# Allegro board XR829_MD01_V1.0.brd
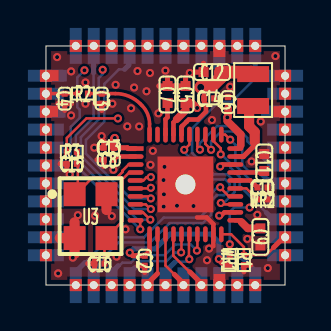
[diagram p0: board, top side]
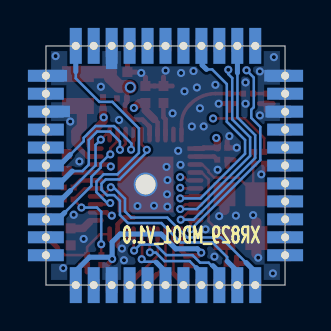
[diagram p1: board, bottom side, seen from below]

Outline 11.99 x 11.99 mm; copper layers: TOP, GND, POWER, BOTTOM. Coordinates in mm from the lower left corner of the outline.
Outline path: 0,11.99 11.99,11.99 11.99,0 0,0 0,11.99

## Placement (name value [footprint] x y rotation side)
C2  104  [C0201]  4.95 1.22 270 top
C3  NC/2PF  [C0201]  2.79 9.35 270 top
C4  NC/2PF  [C0201]  0.94 9.35 270 top
C5  1uF  [C0402]  7 9.56 90 top
C6  104  [C0201]  9.13 9.17 90 top
C7  1uF  [C0402]  6.1 9.56 90 top
C8  0.47uF  [C0201]  3.15 6.28 180 top
C9  2.2uF  [C0402]  10.75 2.42 270 top
C10  0.47uF  [C0201]  10.85 4.89 0 top
C11  1uF  [C0402]  10.95 6.15 90 top
C12  4.7uF  [C0402]  8.33 10.68 180 top
C13  104  [C0201]  3.15 6.88 180 top
C14  104  [C0201]  8.18 9.36 0 top
C15  20pF  [C0201]  1.3 6.08 180 top
C16  20pF  [C0201]  2.68 1.07 180 top
L3  2.2uH-0.6A DCR<0.2R/NC  [L0806]  10.39 9.78 90 top
R1  NC-0R  [R0201]  9.93 1.25 270 top
R2  0R/1.8nH  [R0201]  1.85 9.6 180 top
R3  NC-0R  [R0201]  1.3 6.68 180 top
U1  XR829  [XR829_QFN40]  6.99 5.04 270 top
U2  Module-AP6XXX  [WIFI-AP6210-SMALLPIN]  5.99 5.99 0 top
U3  24MHz-E3SB24E004304E  [CRY-TSX3225]  2.24 3.45 0 top
WR1  NC/0R  [R0201]  9.21 1.25 270 top
WR2  0R/NC  [R0201]  10.85 4.29 0 top

## Library data of the parts
C2 C5-C12 C15 C16 = CAPACITOR
C3 C4 C13 C14 = CAPACITOR_0
L3 = INDUCTOR
R1 R3 = R0402_1.06K_WALSIN
R2 WR1 WR2 = R
U1 = AW1732-nosocket
U2 = Voice-MD_3
U3 = Crystal4Pin_0

## Footprints (pads in the part's own frame, mm; a bottom-side part is the same pattern mirrored in y, then rotated)
C0201
  rect 0.3x0.3 smd: 1(-0.25,0) 2(0.25,0)
C0402
  rect 0.5x0.5 smd: 1(-0.425,0) 2(0.425,0)
CRY-TSX3225
  rect 1.1x1.2 smd: 1(-0.8,1.1) 2(-0.8,-1.1) 3(0.8,-1.1) 4(0.8,1.1)
L0806
  rect 0.8x1.6 smd: 1(0.8,0) 2(-0.8,0)
R0201
  rect 0.3x0.3 smd: 1(-0.25,0) 2(0.25,0)
WIFI-AP6210-SMALLPIN
  rect 0.6x0.6 hole 0.4: 1(-6,4.5) 2(-6,3.6) 3(-6,2.7) 4(-6,1.8) 5(-6,0.9) 6(-6,0) 7(-6,-0.9) 8(-6,-1.8) 9(-6,-2.7) 10(-6,-3.6) 11(-6,-4.5) 12(-4.5,-6) 13(-3.6,-6) 14(-2.7,-6) 15(-1.8,-6) 16(-0.9,-6) 17(0,-6) 18(0.9,-6) 19(1.8,-6) 20(2.7,-6) 21(3.6,-6) 22(4.5,-6) 23(6,-4.5) 24(6,-3.6) 25(6,-2.7) 26(6,-1.8) 27(6,-0.9) 28(6,0) 29(6,0.9) 30(6,1.8) 31(6,2.7) 32(6,3.6) 33(6,4.5) 34(4.5,6) 35(3.6,6) 36(2.7,6) 37(1.8,6) 38(0.9,6) 39(0,6) 40(-0.9,6) 41(-1.8,6) 42(-2.7,6) 43(-3.6,6) 44(-4.5,6)
XR829_QFN40
  rect 0.23x0.8 smd: 1(-1.8,-2.5)
  oval 0.23x0.8 smd: 2(-1.4,-2.5) 3(-1,-2.5) 4(-0.6,-2.5) 5(-0.2,-2.5) 6(0.2,-2.5) 7(0.6,-2.5) 8(1,-2.5) 9(1.4,-2.5) 10(1.8,-2.5) 21(1.8,2.5) 22(1.4,2.5) 23(1,2.5) 24(0.6,2.5) 25(0.2,2.5) 26(-0.2,2.5) 27(-0.6,2.5) 28(-1,2.5) 29(-1.4,2.5) 30(-1.8,2.5)
  oval 0.8x0.23 smd: 11(2.5,-1.8) 12(2.5,-1.4) 13(2.5,-1) 14(2.5,-0.6) 15(2.5,-0.2) 16(2.5,0.2) 17(2.5,0.6) 18(2.5,1) 19(2.5,1.4) 20(2.5,1.8) 31(-2.5,1.8) 32(-2.5,1.4) 33(-2.5,1) 34(-2.5,0.6) 35(-2.5,0.2) 36(-2.5,-0.2) 37(-2.5,-0.6) 38(-2.5,-1) 39(-2.5,-1.4) 40(-2.5,-1.8)
  rect 2.8x2.8 hole 1: 41(0,0)

## Nets
GND: C2.2 C3.2 C4.2 C5.2 C6.2 C7.2 C8.2 C9.2 C10.2 C11.2 C12.2 C13.2 C14.2 C15.2 C16.2 R1.2 U1.19(TEN) U1.41(EPAD) U2.1(GND1) U2.3(GND2) U2.20(GND3) U2.31(GND4) U2.33(GND5) U2.36(GND6) U3.2 U3.4(5) WR2.2
VBAT: C5.1 C6.1 U1.30(VBAT1) U1.37(VBAT2) U2.9(VBAT)
VDDIO: C2.1 U1.11(VDD_IO) U2.22(VDDIO) WR1.2
ANT: C4.1 R2.2 U2.2(ANT)
AP-WAKE-BT: U1.5(BT_HOST_WKUP) U2.6(BT-WAKE)
BT-PCM-CLK: U1.31(PCM_CLK) U2.26(PCM-CLK)
BT-PCM-DIN: U1.33(PCM_DIN) U2.27(PCM-IN)
BT-PCM-DOUT: U1.32(PCM_DOUT) U2.25(PCM-OUT)
BT-PCM-SYNC: U1.34(PCM_SYNC) U2.28(PCM-SYNC)
BT-RESETN: U1.23(BT_RSTN) U2.34(BT-RST-N)
BT-UART-CTS: U1.8(UART_CTS) U2.44(UART-CTS-N)
BT-UART-RTS: U1.7(UART_RTS) U2.41(UART-RTS-N)
BT-UART-RX: U1.9(UART_RX) U2.43(UART-RXD)
BT-UART-TX: U1.10(UART_TX) U2.42(UART-TXD)
BT-WAKE-AP: U1.6(BT_WKUP_HOST) U2.7(BT-HOST-WAKE)
LPCLK: R1.1 U1.20(LPCLK) U2.24(LPO)
WIRQ: U1.35(WIRQ) U2.13(WL-HOST-WAKE)
WL-RESETN: U1.24(WL_RSTN) U2.12(WL-REG-ON)
WL-SDIO-CLK: U1.16(SDIO_CLK) U2.17(SDIO-DATA-CLK)
WL-SDIO-CMD: U1.12(SDIO_CMD) U2.16(SDIO-DATA-CMD)
WL-SDIO-D0: U1.13(SDIO_D0) U2.18(SDIO-DATA0)
WL-SDIO-D1: U1.14(SDIO_D1) U2.19(SDIO-DATA1)
WL-SDIO-D2: U1.17(SDIO_D2) U2.14(SDIO-DATA2)
WL-SDIO-D3: U1.15(SDIO_D3) U2.15(SDIO-DATA3)
XTAL1: C16.1 U1.4(XTAL1) U3.3
XTAL2: C15.1 R3.1 U1.3(XTAL2) U3.1
N17007460: R3.2 U2.30(TCXO-IN)
N17009392: C12.1 C13.1 C14.1 L3.1 U1.1(VDD14_RX) U1.22(VDD14_DIG) U1.28(VDD_SENSE) U1.36(VDD14_TX)
N17009409: C3.1 R2.1 U1.40(ANT)
N17009543: U1.25(LDO_SEL) WR1.1 WR2.1
N17009563: C11.1 U1.27(VDD25_EF)
N17009579: C10.1 U1.26(VDD_RTC)
N17009597: C9.1 U1.21(VDD12_DIG)
N17009620: C7.1 U1.38(VDD33_PA)
N17009636: C8.1 U1.2(VDD12_CLK)
N17009791: L3.2 U1.29(VDD_VLX)

Pads without a net: U1 18 39; U2 4 5 8 10 11 21 23 29 32 35 37 38 39 40

## Via types
v1: diameter 0.406, hole 0.203, TOP to BOTTOM, 74 vias
v2: diameter 0.559, hole 0.356, TOP to BOTTOM, 1 via

## Routing (per net, layer and track width the routed paths; a pad name or vN(x,y) marks a point on that pad's centre or on a via; arc(x,y) is an arc through that point)
GND: length 21
  TOP w0.229: 7.58,3.39 8.06,3.39 8.39,3.05 U1.19 8.39,1.95
  TOP w0.254: 2.09,1.07 C16.2 ; C16.2 2.43,0.73 ; C16.2 2.43,1.42 ; 0.7,6.08 C15.2 1.05,5.74 ; 2.9,7.22 C13.2 2.56,6.88 ; 2.45,9.1 C3.2 ; C3.2 3.14,9.1 ; C3.2 2.79,8.76 ; 9.93,0.66 R1.2 10.27,1 ; 0.6,9.1 C4.2 ; C4.2 0.94,8.76 ; C4.2 1.28,9.1 ; 6.56,9.98 C5.2 7,10.42 ; C7.2 6.54,9.98 ; C7.2 6.1,10.42 ; C7.2 5.65,9.98 ; 2.9,5.94 C8.2 2.56,6.28 ; 7.46,10.68 C12.2 7.9,11.12 ; 4.95,0.63 C2.2 4.61,0.97
  TOP w0.508: 0.69,2.35 U3.2 ; U3.2 1.44,3.15 ; U3.2 1.44,1.56 ; 3.04,3.76 U3.4
  GND w0.457: 8.71,0.66 8.71,0.58
  POWER w0.381: U2.31 11.7,8.69 11.4,8.99 ; v1(1.26,10.71) 1.04,10.49 U2.1 ; v1(1.26,8.51) 1.07,8.69 U2.3 ; 8.65,11.48 8.69,11.52 U2.36 ; 10.55,10.63 10.69,10.49 U2.33 ; U2.20 8.69,0.71 8.7,0.72
  vias: v1(0.56,11.43) v1(0.61,0.58) v1(1.19,5.55) v1(1.35,1.37) v1(1.6,3.51) v1(1.98,10.16) v1(1.98,9.09) v1(2.42,6.89) v1(2.46,3.48) v1(2.79,7.47) v1(3.33,9.09) v1(3.3,3.45) v1(3.38,5.78) v1(3.49,10.04) v1(3.54,1.42) v1(3.99,2.79) v1(4.08,7.96) v1(4.27,8.86) v1(4.42,9.91) v1(4.59,10.73) v1(4.67,7.95) v1(5.04,9.72) v1(5.21,10.63) v1(5.24,6.03) v1(5.36,6.73) v1(5.64,8.61) v1(5.94,5.93) v1(5.9,5.26) v1(5.92,4.55) v1(5.9,3.93) v1(5.99,10.75) v1(6.57,3.98) v1(7.21,10.64) v1(7.4,3.96) v1(8.08,1.24) v1(8.18,1.83) v1(8.32,8.27) v1(9.24,9.94) v1(10.1,2.31) v1(10.31,6.2) v1(10.6,3.52) v1(10.77,8.2) v1(11.12,0.85) v1(11.51,11.48)
VBAT: length 22.8
  TOP w0.229: 6.55,8.31 6.39,8.15 U1.37 ; C6.1 9.13,8.88 ; U1.30 9.6,6.84 9.77,7.01
  TOP w0.254: 9.07,8.43 v1(9.09,8.41)
  TOP w0.381: v1(7.58,8.88) 7.56,8.88 7.31,9.13 C5.1 7,8.76 6.55,8.31 ; 9.13,8.88 9.13,8.44 v1(9.09,8.41) 9.09,8.23 9.77,7.55 9.77,7.01
  POWER w0.508: U2.9 0.67,3.29 1.78,2.18 5.08,2.18 5.67,2.77 8.87,2.77 8.92,2.82 8.96,2.82 9.45,3.31 9.45,6.58 9.86,6.99 9.86,7.65 v1(9.09,8.41) 8.62,8.88 v1(7.58,8.88)
VDDIO: length 11.4
  TOP w0.127: C2.1 4.95,1.47
  TOP w0.229: 4.95,1.47 5.19,1.71 U1.11
  TOP w0.254: WR1.2 8.92,1 8.67,1.26 v1(8.67,1.31) ; v1(4.2,1.62) 4.35,1.47 4.95,1.47
  BOTTOM w0.254: v1(4.2,1.62) 4.4,1.82 5.48,1.82 6.22,2.56 8.27,2.56 8.67,2.15 v1(8.67,1.31) 8.76,1.4 9.8,1.4 10.49,0.7 U2.22
ANT: length 1.6
  TOP w0.178: 0.91,9.6 R2.2 ; 0.91,9.6 0.91,9.6 C4.1 ; 0.91,9.6 -0.01,9.6 U2.2
AP-WAKE-BT: length 6.5
  TOP w0.127: U1.5 4.88,5.24 5.05,5.41 v1(5.26,5.41)
  POWER w0.127: 0.58,5.99 1.33,5.99 2.17,5.16 4.83,5.16 5.08,5.41 v1(5.26,5.41)
  POWER w0.254: 0.58,5.99 U2.6
BT-PCM-CLK: length 5.2
  TOP w0.127: U1.31 8.98,7.54 v1(9.24,7.29)
  BOTTOM w0.127: v1(9.24,7.29) 9.5,7.03 9.5,6 10.76,4.74
  BOTTOM w0.254: 10.76,4.74 11.31,4.19 U2.26
BT-PCM-DIN: length 7
  TOP w0.127: U1.33 7.99,7.07 8.28,6.79 v1(8.28,6.78)
  BOTTOM w0.127: 10.67,5.71 10.16,5.71 9.84,6.03 9.84,7.28 9.42,7.7 8.78,7.7 8.28,7.2 v1(8.28,6.78)
  BOTTOM w0.254: 10.67,5.71 11.29,5.09 U2.27
BT-PCM-DOUT: length 6.1
  TOP w0.127: U1.32 8.39,7.23 8.76,6.86 v1(8.76,6.55)
  BOTTOM w0.127: 11.05,3.63 9.71,4.97 9.71,5.43 9.25,5.89 9.25,6.1 8.79,6.55 v1(8.76,6.55)
  BOTTOM w0.254: U2.25 11.39,3.29 11.05,3.63
BT-PCM-SYNC: length 6.7
  TOP w0.127: v1(7.72,6.79) 7.7,6.81 7.7,6.82 7.59,6.93 U1.34
  BOTTOM w0.127: 10.77,6.54 10.1,7.21 10.1,7.38 9.5,7.97 8.58,7.97 7.7,7.1 7.7,6.83 7.72,6.81 v1(7.72,6.79)
  BOTTOM w0.254: U2.28 11.31,5.99 10.77,6.54
BT-RESETN: length 12
  TOP w0.127: v1(8.77,4.11) 8.84,4.04 U1.23
  BOTTOM w0.127: v1(8.77,4.11) 8.92,4.11 9.46,4.66 9.46,5.19 9.1,5.55 8.4,5.55 7.33,6.63 7.33,7.85 8.66,9.18 9.31,9.18 10.49,10.37 10.49,10.7
  BOTTOM w0.254: U2.34 10.49,10.7
BT-UART-CTS: length 12.4
  TOP w0.127: v1(5.26,3.81) 5.23,3.81 5,4.04 U1.8
  POWER w0.127: 1.52,11.48 1.54,11.48 1.71,11.31 2.33,11.31 v1(2.84,10.79)
  POWER w0.254: 1.52,11.48 1.5,11.5 1.5,11.99 U2.44
  BOTTOM w0.127: v1(2.84,10.79) 2.84,10.58 2.65,10.38 2.65,8.31 1.75,7.41 1.75,6.48 4.42,3.81 v1(5.26,3.81) ; v1(5.26,3.81) 5.27,3.79 ; v1(5.26,3.81) 5.24,3.79
BT-UART-RTS: length 11.5
  TOP w0.127: v1(5.26,4.34) 5.16,4.44 U1.7
  BOTTOM w0.127: 3.94,10.82 3.65,10.82 2.92,10.08 2.92,8.19 2,7.27 2,6.58 4.24,4.34 v1(5.26,4.34) 5.24,4.36
  BOTTOM w0.254: 3.94,10.82 4.15,11.03 4.15,11.95 U2.41
BT-UART-RX: length 12
  TOP w0.127: U1.9 4.86,3.64 v1(5.23,3.28)
  BOTTOM w0.127: 2.39,10.64 2.39,8.41 1.5,7.52 1.5,6.37 4.59,3.28 v1(5.23,3.28) 5.27,3.24
  BOTTOM w0.254: U2.43 2.39,11.99 2.39,10.64
BT-UART-TX: length 13.4
  TOP w0.127: v1(4.73,2.8) 4.73,2.81 4.72,2.81 4.72,3.12 4.6,3.24 U1.10
  POWER w0.127: 3.3,11.43 3.3,10.69 3,10.39 2.31,10.39 v1(1.93,10.77)
  POWER w0.254: U2.42 3.3,11.99 3.3,11.43
  BOTTOM w0.127: v1(1.93,10.77) 1.57,10.41 1.57,8.92 1.69,8.79 1.69,8.38 1.24,7.93 1.24,6.27 4.7,2.81 4.72,2.81 v1(4.73,2.8)
BT-WAKE-AP: length 6.1
  TOP w0.127: U1.6 5.23,4.84 v1(5.26,4.88)
  POWER w0.127: v1(5.26,4.88) 0.79,4.88 0.56,5.11
  POWER w0.254: U2.7 0.01,5.11 0.56,5.11
LPCLK: length 4.2
  TOP w0.127: U1.20 9.29,2.54 9.93,1.91 R1.1 11.04,1.5 11.41,1.88
  TOP w0.254: U2.24 11.93,2.39 11.41,1.88
WIRQ: length 14
  TOP w0.127: U1.35 7.19,7.04 v1(6.93,6.78)
  BOTTOM w0.127: 2.9,1.2 2.9,1.4 3.64,2.13 5.23,2.13 6.2,3.11 7.87,3.11 8.28,3.51 8.28,4.22 8.57,4.51 8.9,4.51 8.94,4.51 9.2,4.78 9.2,5.08 8.99,5.3 8.3,5.3 6.93,6.66 v1(6.93,6.78)
  BOTTOM w0.254: 2.9,1.2 2.39,0.69 U2.13
WL-RESETN: length 11
  TOP w0.127: U1.24 9.49,4.43 9.19,4.43 8.73,4.89 v1(8.74,4.9)
  BOTTOM w0.127: 1.96,1.13 3.22,2.39 4.91,2.39 5.91,3.38 7.72,3.38 8.03,3.69 8.03,4.33 8.6,4.9 v1(8.74,4.9)
  BOTTOM w0.254: 1.96,1.13 1.49,0.67 U2.12
WL-SDIO-CLK: length 3.5
  TOP w0.127: v1(7.19,1.3) 7.16,1.32 7.16,1.46 7.17,1.47 7.17,2.52 U1.16
  BOTTOM w0.127: 6.46,1.14 6.49,1.17 7.06,1.17 v1(7.19,1.3)
  BOTTOM w0.254: U2.17 5.95,-0.01 5.95,0.63 6.46,1.14
WL-SDIO-CMD: length 2.8
  TOP w0.127: 5.59,0.58 U1.12
  TOP w0.254: 5.59,0.58 5.09,0.08 U2.16
WL-SDIO-D0: length 2.9
  TOP w0.127: U1.13 5.99,0.98 6.44,0.53
  TOP w0.254: U2.18 6.89,0.08 6.44,0.53
WL-SDIO-D1: length 3.2
  TOP w0.127: U1.14 6.38,2.53 6.38,1.47 7.2,0.66 7.21,0.66
  TOP w0.254: U2.19 7.79,0.03 7.81,0.04 7.81,0.07 7.21,0.66
WL-SDIO-D2: length 6.5
  TOP w0.127: U1.17 7.59,1.79 v1(7.57,1.73)
  BOTTOM w0.127: 3.62,0.97 3.7,0.97 3.7,0.99 3.83,1.12 4.26,1.12 4.64,1.5 5.96,1.5 6.49,2.03 7.26,2.03 v1(7.57,1.73)
  BOTTOM w0.254: 3.62,0.97 3.29,0.64 U2.14
WL-SDIO-D3: length 4.5
  TOP w0.127: U1.15 6.79,1.65 6.78,1.64 v1(6.78,1.64)
  BOTTOM w0.127: v1(6.78,1.64) 6.77,1.63 6.48,1.63 6.05,1.2 4.78,1.2 4.46,0.87
  BOTTOM w0.254: U2.15 4.19,0.61 4.46,0.87
XTAL1: length 5.4
  TOP w0.127: U1.4 4.18,5.64 3.84,5.3 3.84,3.2 3.04,2.4 U3.3 2.93,2.25 C16.1
XTAL2: length 5.8
  TOP w0.127: U3.1 1.5,4.55 1.6,4.65 ; U1.3 4.15,6.04 3.84,5.73 3.84,5.67 3.56,5.39 2.33,5.39 1.6,4.65 ; R3.1 C15.1 1.6,6.03 1.6,4.65
N17007460: length 14.5
  TOP w0.127: v1(3.61,8.35) 3.56,8.35 3.56,8.36 2.03,8.36 1.05,7.37 R3.2
  POWER w0.127: v1(3.61,8.35) 3.61,8.35 3.62,8.36 4.31,8.36 4.42,8.47 4.43,8.47 4.66,8.7 4.66,8.71 6.98,11.03 7.04,11.03 7.05,11.03 8.71,11.03 11.52,8.22 11.52,8.2
  POWER w0.254: 11.52,8.2 11.92,7.79 U2.30
N17009392: length 22.3
  TOP w0.229: U1.28 8.84,6.04 v1(8.74,5.94) ; U1.36 6.79,7.93 6.84,7.98 6.84,7.98 7.05,8.19 7.05,8.19 7.16,8.3 7.63,8.3 8.03,8.7 8.03,9.06 7.93,9.16 C14.1 7.93,9.74 v2(7.76,9.92) ; v1(8.69,3.48) 8.78,3.48 8.95,3.64 U1.22
  TOP w0.254: U1.1 4.12,6.84 4.08,6.88 C13.1
  TOP w0.381: C13.1 3.4,7.32 v1(3.45,7.38)
  TOP w0.635: v2(7.76,9.92) 7.81,9.96 8.32,9.96 8.75,10.4 C12.1 10.29,10.68 L3.1
  POWER w0.508: v1(8.69,3.48) 8.61,3.48 8.18,3.91 8.18,5.71 7.95,5.94 ; 6.35,7.37 6.35,9.04 7.23,9.92 v2(7.76,9.92) ; 6.35,7.37 3.46,7.37 v1(3.45,7.38) ; 6.35,7.37 6.35,6.54 6.69,6.2 7.7,6.2 7.95,5.94 ; 7.95,5.94 v1(8.74,5.94)
N17009409: length 4.5
  TOP w0.178: C3.1 2.78,9.6 2.78,9.6 ; 2.78,9.6 3.49,9.6 arc(4.16,9.47) 4.73,9.08 4.81,9.01 arc(5.09,8.58) 5.19,8.08 U1.40 ; 2.78,9.6 R2.1
N17009543: length 5.2
  TOP w0.127: v1(9.22,2.04) 9.22,1.51 WR1.1 ; U1.25 10.05,4.84 WR2.1 10.6,4.28 v1(10.21,3.89)
  BOTTOM w0.127: v1(10.21,3.89) 9.43,3.89 9.22,3.67 v1(9.22,2.04)
N17009563: length 1.5
  TOP w0.229: U1.27 10.87,5.64 C11.1
N17009579: length 1.3
  TOP w0.229: U1.26 10.25,5.24 C10.1
N17009597: length 1.4
  TOP w0.229: 9.81,3.15 9.72,3.24 U1.21
  TOP w0.381: 9.81,3.15 10.12,2.84 C9.1
N17009620: length 1.6
  TOP w0.229: U1.38 5.99,8.31 6.1,8.41 C7.1
N17009636: length 1.2
  TOP w0.229: C8.1 3.56,6.44 U1.2
N17009791: length 3.4
  TOP w0.254: 10.47,7.19 10.47,7.01 9.9,6.44 U1.29
  TOP w0.508: L3.2 10.19,8.78 10.19,7.96 10.47,7.68 10.47,7.19

## Copper pours and planes (outline as drawn; the poured copper is in the pictures)
GND on TOP, GND, POWER: 0.25,0.25 0.25,11.73 11.73,11.73 11.73,0.25
GND on BOTTOM: 0.25,0.25 0.25,11.73 11.73,11.73 11.73,0.25 ; 1 cut-out
GND on POWER: 1.2,5.78 1.3,5.76 1.38,5.7 1.56,5.53 1.61,5.25 1.38,5.09 1.03,5.09 0.9,5.13 0.81,5.23 0.77,5.28 0.73,5.32 0.65,5.61 0.89,5.78

Small or netless copper shapes (teardrops, artwork), in the pictures only: 6 on TOP, 6 on BOTTOM

## Text on the board
Ref Des/Silkscreen Bottom: XR829_MD01_V1.0
